# Altium PCB wirn.PcbDoc
Units mm, origin at the board's own origin, x right, y up, seen from the top; angles counter-clockwise.
Board outline 100 x 50 mm, 2 copper layers (Top Layer, Bottom Layer); 19 components, 14 nets, 48 pads, 0 vias.
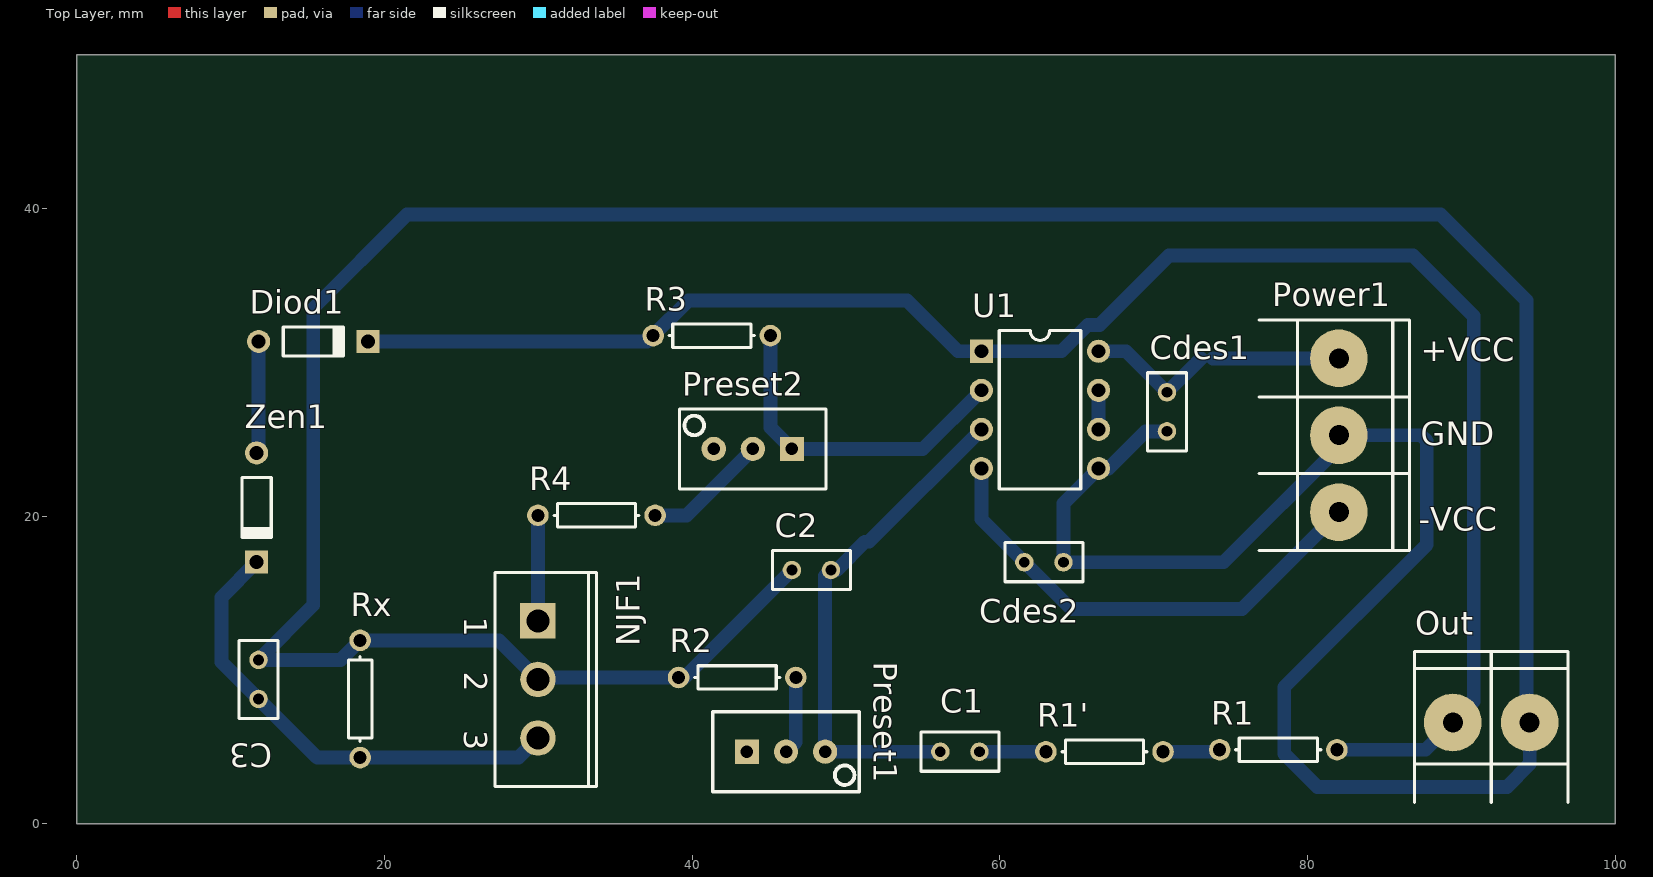
[diagram p0: Top Layer view]
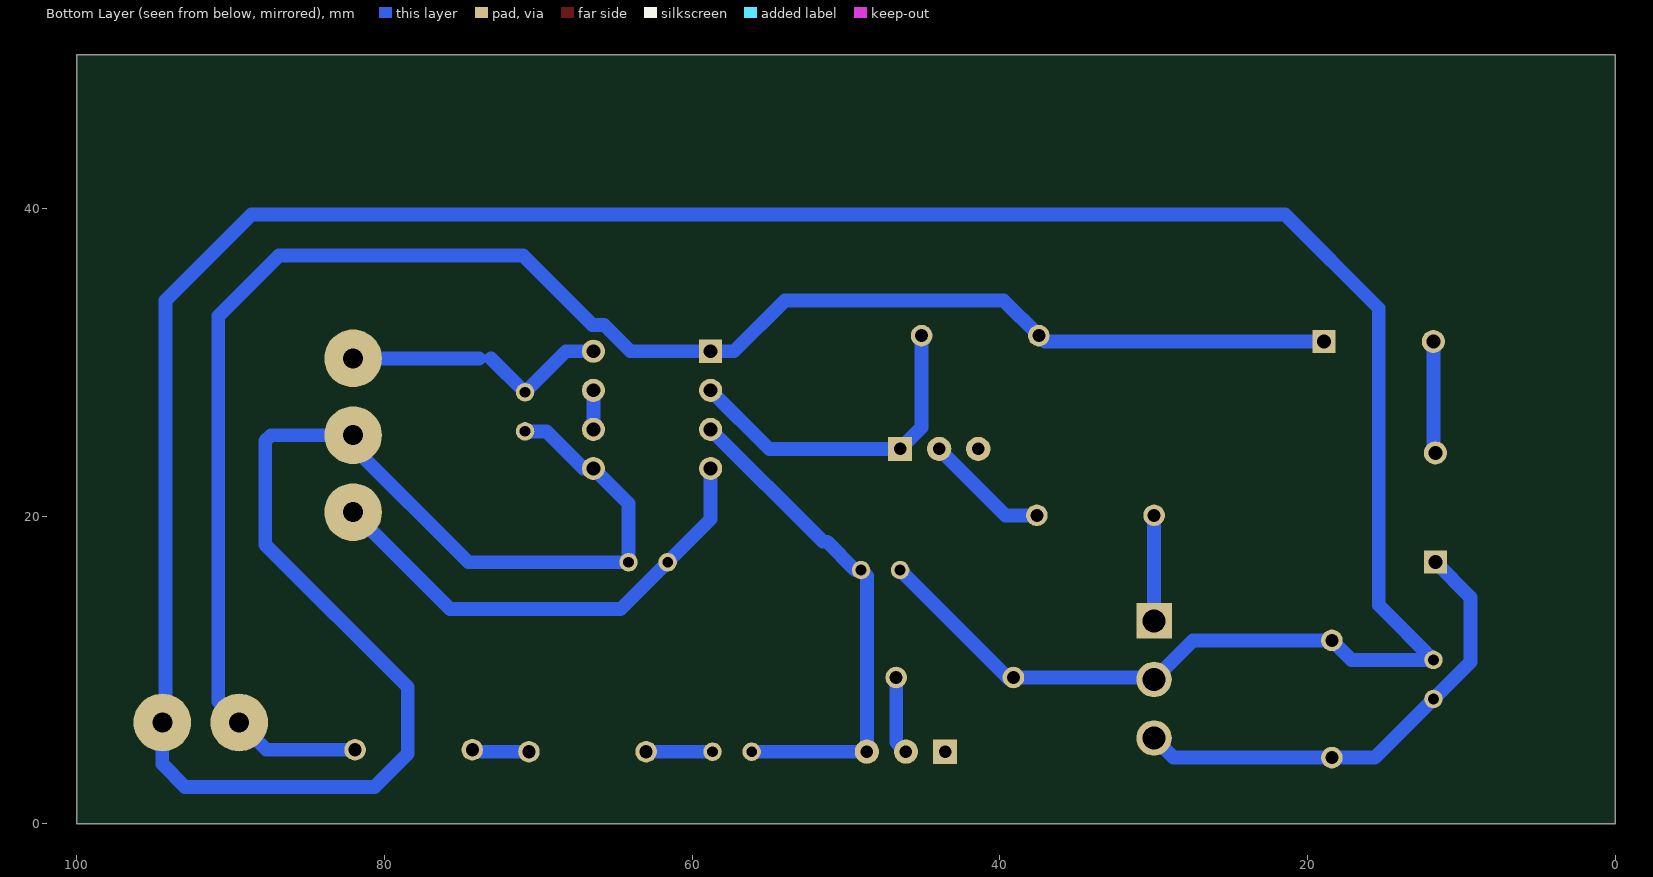
[diagram p1: Bottom Layer view, seen from below]

## Layer stack, top to bottom
Top Solder: solder mask 0.0102, Solder Resist, Dk 3.5
Top Layer: signal copper 0.0356
Dielectric 1: dielectric 0.32, FR-4, Dk 4.8
Bottom Layer: signal copper 0.0356
Bottom Solder: solder mask 0.0102, Solder Resist, Dk 3.5

## Board outline
100,0 100,50 0,50 0,0

## Design rules (kind name [scope] priority, off if disabled: settings)
Clearance [All] p1: gap=0.5 ignorepadtopadclearanceinfootprint=FALSE
PolygonConnect [All] p1: connectstyle=Relief reliefconductorwidth=0.254 reliefentries=4 polygonreliefangle="90 Angle" airgapwidth=0.254
RoutingVias [All] p1: holewidth=0.711 width=1.27 viastyle="Through Hole" minholewidth=0.711 minwidth=1.27 maxholewidth=0.711 maxwidth=1.27
SolderMaskExpansion [All] p1: expansion=0.102
Width [All] p1: maxlimit=0.9 minlimit=0.6 preferedwidth=0.9
30 further rules are at their usual default settings.

## Components (designator, comment, footprint, x,y, rotation, side; value= is the part's Value field where it differs from the comment)
C1 "1n" RAD-0.1 57.404,4.699 r0 top
C2 "1n" RAD-0.1 47.752,16.51 r0 top
C3 "1u" RAD-0.1 11.811,9.398 r270 top
Cdes1 "100n" RAD-0.1 70.866,26.797 r270 top
Cdes2 "100n" RAD-0.1 62.865,17.018 r180 top
Diod1 "" DO-35 15.367,31.369 r0 top
NJF1 "JFET-N" TO-254-AA 29.972,9.398 r270 top
Out "BORNERA 2" BORNERA2 91.948,6.604 r270 top (schematic designator Out1)
Power1 "BORNERA 3" BORNERA3 82.042,25.273 r180 top
Preset1 "500" "PRESET V" 46.101,4.699 r0 top
Preset2 "10k" "PRESET V" 43.942,24.384 r180 top
R1 "1K8" AXIAL-0.3 78.105,4.826 r0 top
R1' "39" AXIAL-0.3 66.802,4.699 r0 top
R2 "1k5" AXIAL-0.3 42.926,9.525 r0 top
R3 "100k" AXIAL-0.3 41.275,31.75 r180 top
R4 "39k" AXIAL-0.3 33.782,20.066 r180 top
Rx "1meg" AXIAL-0.3 18.415,8.128 r270 top
U1 "TL082JG" JG008 62.611,26.924 r270 top
Zen1 "D Zener" DO-35 11.684,20.574 r270 top

## Footprints (in the part's own frame and the unit in brackets; to place one, negate y for a bottom-side part, rotate by r counter-clockwise, add the part's x,y. Pads: shape width x height; smd on the part's side, far side on the other; paste and mask are expansions set on the pad)
AXIAL-0.3 [mm] "Axial Device, Thru-Hole; 2 Leads; 0.3 in Pin Spacing"
  round 1.4 hole 0.85: 1(-3.81,0) 2(3.81,0)
  silkscreen extent -2.77,-0.76 2.77,0.76
BORNERA2 [mm] "Bornera con Tornillos 5mm separación"
  round 3.75 hole 1.3: 1(0,2.5) 2(0,-2.5)
  silkscreen extent -4.6,-5 5.2,5, body extent -3.76,-4.89 3.94,5.61, height 10
BORNERA3 [mm] "Bornera con Tornillos 5mm separación"
  round 3.75 hole 1.3: 1(0,5) 2(0,0) 3(0,-5)
  silkscreen extent -4.6,-7.5 5.2,7.5, body extent -3.76,-7.39 3.94,8.11, height 10.05
DO-35 [mm] "Diode, Axial; Body 3.8 x 1.9 mm (LxDia. max), Lead Dia. 0.53 mm (max)"
  round 1.5 hole 0.9: 1(-3.55,0)
  rect 1.5x1.5 hole 0.9: 2(3.55,0)
  silkscreen extent -1.95,-0.95 2.05,0.95
JG008 [mm] "DIP; 8 Leads; Row Spacing 7.62 mm; Pitch 2.54 mm"
  rect 1.5x1.5 hole 0.9: 1(-3.81,-3.81)
  round 1.5 hole 0.9: 2(-1.27,-3.81) 3(1.27,-3.81) 4(3.81,-3.81) 5(3.81,3.81) 6(1.27,3.81) 7(-1.27,3.81) 8(-3.81,3.81)
  silkscreen extent -5.15,-2.65 5.15,2.65
"PRESET V" [mil]
  rect 62x62 hole 32: 1(-100,0)
  round 62 hole 32: 2(0,0) 3(100,0)
  silkscreen extent -188,-102 188,102, body extent -185,-95 190,95, height 455
RAD-0.1 [mm] "Radial Cap, Thru-Hole; 2 Leads; 0.1 in Pin Spacing"
  round 1.2 hole 0.7: 1(-1.27,0) 2(1.27,0)
  silkscreen extent -2.54,-1.27 2.54,1.27
TO-254-AA [mm] "TO, Thru-Hole, Vertical, Heatsink Mounted; 3 In-Line Leads; Pitch 3.81 mm"
  rect 2.3x2.3 hole 1.5: 1(-3.81,0)
  round 2.3 hole 1.5: 2(0,0) 3(3.81,0)
  silkscreen extent -6.95,-2.8 6.95,3.8

## Part data
C1 C2 C3 Cdes1 Cdes2: library part Cap, "Capacitor", LatestRevisionDate=17-Jul-2002, LatestRevisionNote="Re-released for DXP Platform.", PackageDescription="Radial Cap, Thru-Hole; 2 Leads; 0.3 in Pin Spacing", PackageReference=RAD-0.3, Published=8-Jun-2000, Publisher="Altium Limited"
Diod1: library part "Diode 1N4148", "High Conductance Fast Diode", Code_JEDEC=DO-204-AH, ComponentLink1Description="Manufacturer Link", ComponentLink1URL=http://www.fairchildsemi.com/, ComponentLink2Description=Datasheet, ComponentLink2URL=http://www.fairchildsemi.com/ds/1N%2F1N4148.pdf, DatasheetVersion=1997, LatestRevisionDate=17-Jul-2002, LatestRevisionNote="Re-released for DXP Platform.", PackageDescription="Diode, Axial; Body 3.8 x 1.9 mm (LxDia. max), Lead Dia. 0.53 mm (max)", PackageReference=DO-35, Published=8-Jun-2000, Publisher="Altium Limited"
NJF1: "N-Channel JFET", Code_JEDEC=TO-254-AA, LatestRevisionDate=17-Jul-2002, LatestRevisionNote="Re-released for DXP Platform.", PackageReference=TO-254-AA, Published=8-Jun-2000, Publisher="Altium Limited"
Preset1 Preset2: library part PRESET
R1 R1' R2 R3 R4 Rx: library part Res1, "Resistor", LatestRevisionDate=17-Jul-2002, LatestRevisionNote="Re-released for DXP Platform.", PackageDescription="Axial Device, Thru-Hole; 2 Leads; 0.3 in Pin Spacing", PackageReference=AXIAL-0.3, Published=8-Jun-2000, Publisher="Altium Limited"
U1: "JFET-Input Operational Amplifier", ComponentLink1Description="Manufacturer Link", ComponentLink1URL=http://www.ti.com/, ComponentLink2Description=Datasheet, ComponentLink2URL=http://www-s.ti.com/sc/ds/tl082.pdf, DatasheetVersion=Feb-1999, LatestRevisionDate=04-Mar-2005, LatestRevisionNote="Stylized 3D Model Added.", PackageDescription="DIP; 8 Leads; Row Spacing 7.62 mm; Pitch 2.54 mm", PackageReference=JG008, PackageVersion=Jan-1995, Published=16-Jan-2001, Publisher="Altium Limited"
Zen1: "Zener Diode", LatestRevisionDate=17-Jul-2002, LatestRevisionNote="Re-released for DXP Platform.", PackageDescription="Diode, Thru-Hole; 2 Leads; 0.7 in Pin Spacing", PackageReference=DIODE-0.7, Published=8-Jun-2000, Publisher="Altium Limited"

## Nets (pads, with @x,y where several pads share a name; then routed paths per layer and width w, separated by ;. In a path a pad name is that pad's centre, name@x,y a point inside that pad or via, vN(x,y) a via of type N, cw(c..) or ccw(c..) an arc to the next point about the centre after c; other vN are vias at no path point)
GND: C2.1 C3.1 Cdes1.2 Cdes2.1 NJF1.2 Out.1 Power1.2 R2.1 Rx.1 U1.5 | length 259.2
  Bottom Layer w0.9: C2.1 39.497,9.525 R2.1 30.099,9.525 NJF1.2 27.432,11.938 Rx.1 17.145,10.668 C3.1 15.367,14.224 15.367,33.528 21.463,39.624 88.646,39.624 94.234,34.036 94.234,6.818 Out.1 94.448,3.897 92.964,2.413 80.645,2.413 78.486,4.572 78.486,8.89 87.757,18.161 87.757,24.892 87.376,25.273 Power1.2 82.042,24.511 74.549,17.018 Cdes2.1 64.135,20.828 U1.5 67.056,23.114 69.469,25.527 Cdes1.2
NetC1_1: C1.1 C2.2 Preset1.3 U1.3 | length 33
  Bottom Layer w0.9: C1.1 Preset1.3 48.641,16.129 C2.2 49.403,16.51 51.244,18.351 51.498,18.351 U1.3
NetC1_2: C1.2 R1'.1 | length 4.3
  Bottom Layer w0.9: C1.2 R1'.1
NetC3_2: C3.2 NJF1.3 Rx.2 Zen1.2 | length 31.1
  Bottom Layer w0.9: Zen1.2 9.398,14.738 9.398,10.541 C3.2 15.621,4.318 Rx.2 28.702,4.318 NJF1.3
NetDiod1_1: Diod1.1 Zen1.1 | length 7.3
  Bottom Layer w0.9: Zen1.1 11.817,24.257 Diod1.1
NetNJF1_1: NJF1.1 R4.2 | length 6.9
  Bottom Layer w0.9: NJF1.1 R4.2
NetPreset1_2: Preset1.2 R2.2 | length 5.1
  Bottom Layer w0.9: Preset1.2 46.736,5.334 R2.2
NetPreset2_1: Preset2.1 R3.1 U1.2 | length 21.8
  Bottom Layer w0.9: R3.1 45.085,25.781 Preset2.1 54.991,24.384 U1.2
NetPreset2_2: Preset2.2 R4.1 | length 8.1
  Bottom Layer w0.9: R4.1 39.624,20.066 Preset2.2
NetR1'_2: R1'.2 R1.1 | length 3.7
  Bottom Layer w0.9: R1'.2 74.168,4.699 R1.1
NetU1_6: U1.6 U1.7 | length 2.5
  Bottom Layer w0.9: U1.6 U1.7
Out: Diod1.2 Out.2 R1.2 R3.2 U1.1 | length 113.8
  Bottom Layer w0.9: Diod1.2 37.084,31.369 R3.2 39.751,34.036 53.975,34.036 57.277,30.734 U1.1 64.017,30.734 65.717,32.434 66.47,32.434 70.993,36.957 86.868,36.957 90.805,33.02 90.805,7.961 Out.2 87.67,4.826 R1.2
Vcc+: Cdes1.1 Power1.3 U1.8 | length 16.8
  Bottom Layer w0.9: U1.8 68.199,30.734 Cdes1.1 73.072,30.273 ; 73.867,30.273 Power1.3
Vcc-: Cdes2.2 Power1.1 U1.4 | length 31.6
  Bottom Layer w0.9: U1.4 58.801,19.812 Cdes2.2 64.643,13.97 75.739,13.97 Power1.1
pads on no net: Preset1.1 Preset2.3

## Silkscreen, mask and mechanical layers (free items; w line width, h text height)
Top Overlay:
  text "+VCC" at 87.376,30.099 h1.52
  text "GND" at 87.376,24.638 h1.52
  text "-VCC" at 87.249,19.05 h1.52

## Text inside footprints (layer, text, board x,y; h text height)
NJF1: Top Overlay "1" at 25.197,13.458 h1.5 r270; Top Overlay "2" at 25.197,9.898 h1.5 r270; Top Overlay "3" at 25.197,6.088 h1.5 r270